# Altium PCB PCB1.PcbDoc
Units mil, origin at the board's own origin, x right, y up, seen from the top; angles counter-clockwise.
Board outline 3255 x 2045 mil, 2 copper layers (Top Layer, Bottom Layer); 19 components, 24 nets, 80 pads, 0 vias.
Unrouted connection lines stored in the file: 37.
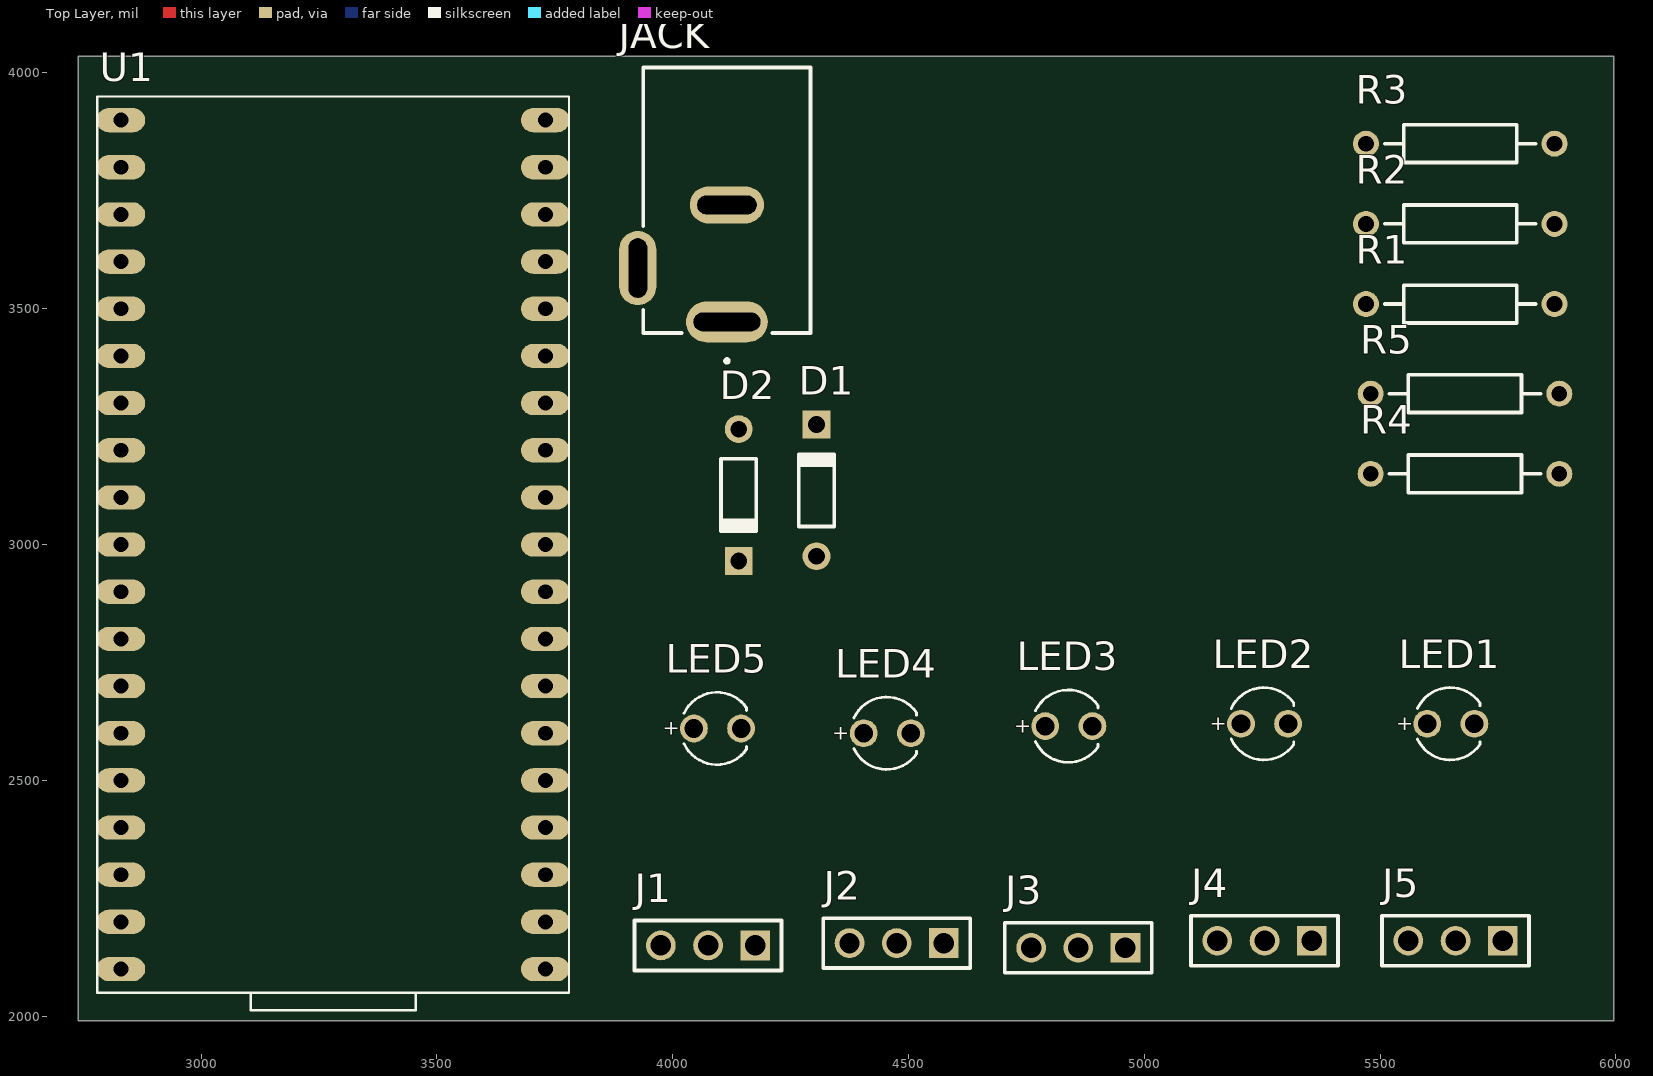
[diagram p0: Top Layer view]
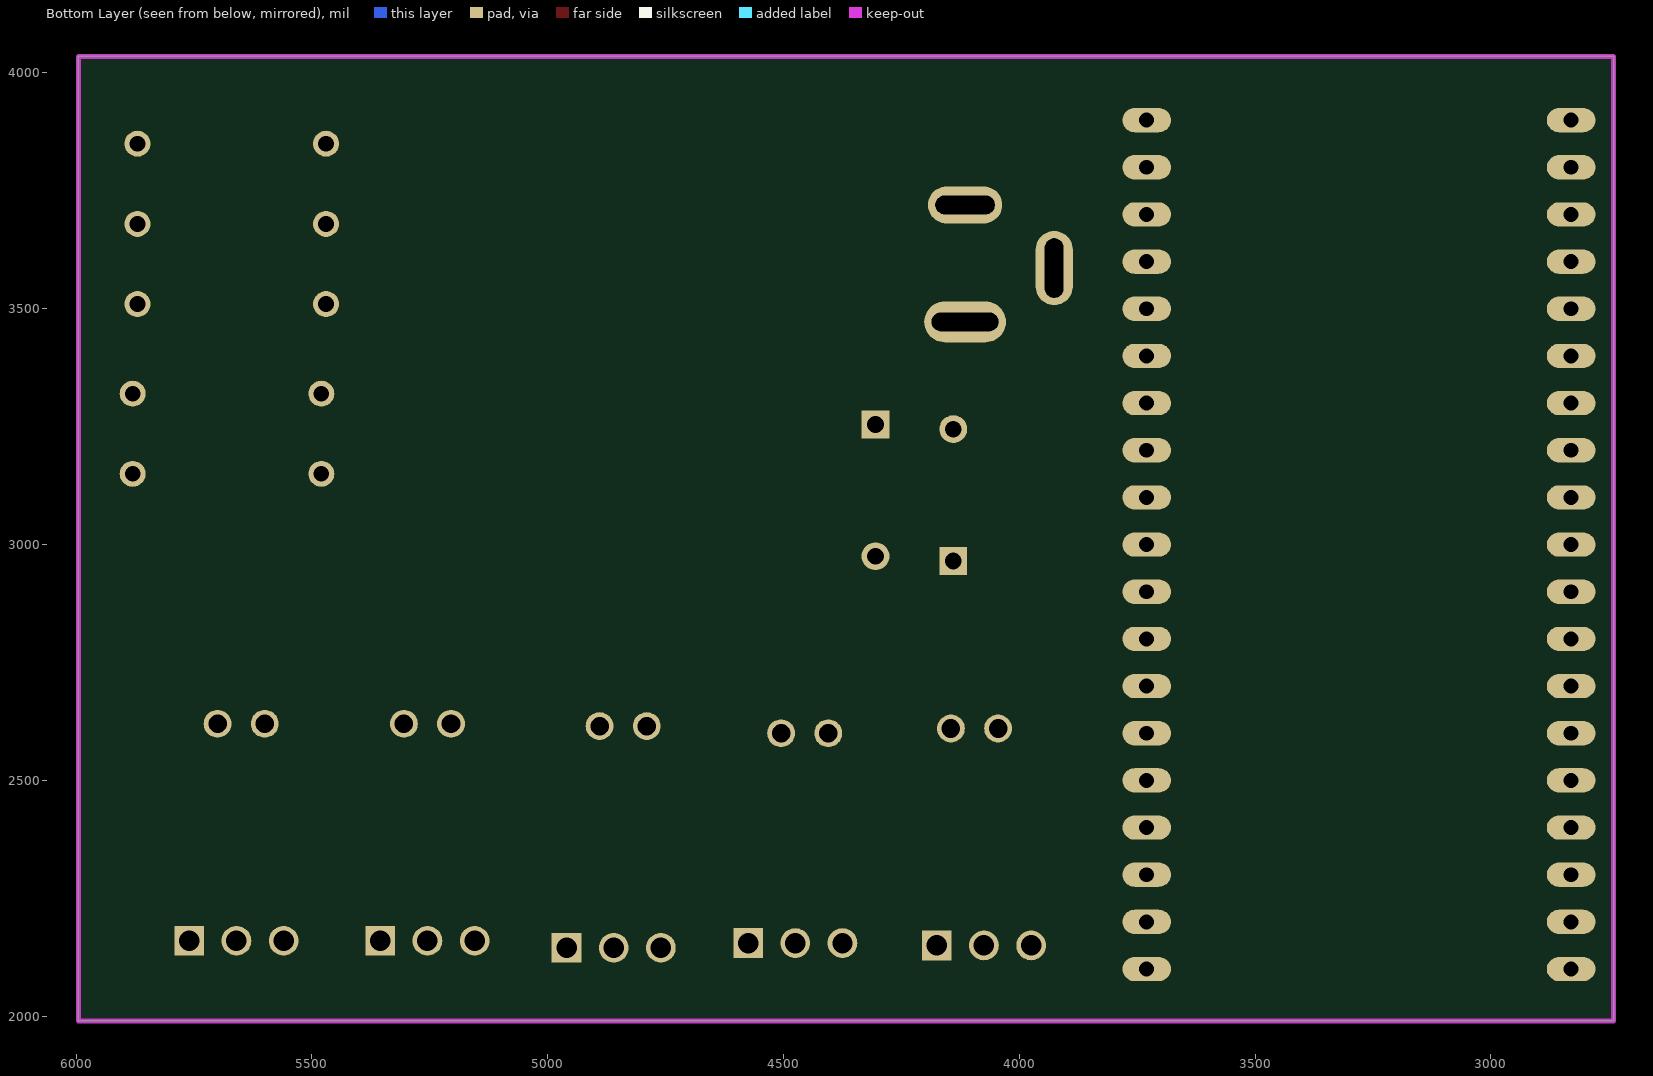
[diagram p1: Bottom Layer view, seen from below]

## Layer stack, top to bottom
Top Solder: solder mask 0.4, Solder Resist, Dk 3.5
Top Layer: signal copper 1.4
Dielectric 1: dielectric 12.6, FR-4, Dk 4.8
Bottom Layer: signal copper 1.4
Bottom Solder: solder mask 0.4, Solder Resist, Dk 3.5

## Board outline
2740,1990 2740,4035 5995,4035 5995,1990

## Design rules (kind name [scope] priority, off if disabled: settings)
Clearance [All] p1: gap=10 ignorepadtopadclearanceinfootprint=FALSE except(0: Arc-Hole Track-Hole SMDPad-Hole THPad-Hole Via-Hole Fill-Hole Poly-Hole Region-Hole Text-Hole)
PolygonConnect [All] p1: connectstyle=Relief reliefconductorwidth=10 reliefentries=4 polygonreliefangle="90 Angle" airgapwidth=10
RoomDefinition "Copy of SCH Placa presentation" [InComponentClass('Copy of SCH Placa presentation')] p1: confinementstyle=ConfineIn formatcopy=TRUE lockcomponents=FALSE outline 2740,1990 5995,1990 5995,4035 2740,4035
RoutingVias [All] p1: holewidth=28 width=50 viastyle="Through Hole" minholewidth=28 minwidth=50 maxholewidth=28 maxwidth=50
SolderMaskExpansion [All] p1: expansion=4 istentingtop=FALSE
Width [All] p1: maxlimit=10 minlimit=10 preferedwidth=10
30 further rules are at their usual default settings.

## Components (designator, comment, footprint, x,y, rotation, side; value= is the part's Value field where it differs from the comment)
D1 "Diode 1N4148" DO-35 4305,3115 r90 top
D2 "Diode 1N4148" DO-35 4140,3105 r270 top
J1 "61300311121" 61300311121 4075,2150 r180 top
J2 "61300311121" 61300311121 4475,2155 r180 top
J3 "61300311121" 61300311121 4860,2145 r180 top
J4 "61300311121" 61300311121 5255,2160 r180 top
J5 "61300311121" 61300311121 5660,2160 r180 top
JACK "DCJ200-10-A-XX-K_REVA" GCT_DCJ200-10-A-XX-K_REVA 4115,3730 r180 top
LED1 "Blue, 3.2V, 40deg" "LED RED 3MM" 5650,2620 r0 top
LED2 "Blue, 3.2V, 40deg" "LED RED 3MM" 5255,2620 r0 top
LED3 "Blue, 3.2V, 40deg" "LED RED 3MM" 4840,2615 r0 top
LED4 "Blue, 3.2V, 40deg" "LED RED 3MM" 4455,2600 r0 top
LED5 "Blue, 3.2V, 40deg" "LED RED 3MM" 4095,2610 r0 top
R1 "Res" "RES AXIAL-0.4" 5670,3510 r0 top value=1K
R2 "Res" "RES AXIAL-0.4" 5670,3680 r0 top value=1K
R3 "Res" "RES AXIAL-0.4" 5670,3850 r0 top value=1K
R4 "Res" "RES AXIAL-0.4" 5680,3150 r0 top value=1K
R5 "Res" "RES AXIAL-0.4" 5680,3320 r0 top value=1K
U1 "NODE MCU 32S" BOARD 3280,3000 r0 top

## Footprints (in the part's own frame and the unit in brackets; to place one, negate y for a bottom-side part, rotate by r counter-clockwise, add the part's x,y. Pads: shape width x height; smd on the part's side, far side on the other; paste and mask are expansions set on the pad)
61300311121 [mm] "Pin Header, pitch 2.54 mm, THT, Vertical, single row, 3p"
  rect 1.6x1.6 hole 1.1: 1(-2.54,0)
  round 1.6 hole 1.1: 2(0,0) 3(2.54,0)
  silkscreen extent -3.96,-1.35 3.96,1.35, body extent -3.81,-1.27 3.81,1.27, height 8.57
BOARD [mm]
  oval 2.616x1.308 hole 0.8: 1(-11.43,22.86) 2(-11.43,20.32) 3(-11.43,17.78) 4(-11.43,15.24) 5(-11.43,12.7) 6(-11.43,10.16) 7(-11.43,7.62) 8(-11.43,5.08) 9(-11.43,2.54) 10(-11.43,0) 11(-11.43,-2.54) 12(-11.43,-5.08) 13(-11.43,-7.62) 14(-11.43,-10.16) 15(-11.43,-12.7) 16(-11.43,-15.24) 17(-11.43,-17.78) 18(-11.43,-20.32) 19(-11.43,-22.86) 20(11.43,22.86) 21(11.43,20.32) 22(11.43,17.78) 23(11.43,15.24) 24(11.43,12.7) 25(11.43,10.16) 26(11.43,7.62) 27(11.43,5.08) 28(11.43,2.54) 29(11.43,0) 30(11.43,-2.54) 31(11.43,-5.08) 32(11.43,-7.62) 33(11.43,-10.16) 34(11.43,-12.7) 35(11.43,-15.24) 36(11.43,-17.78) 37(11.43,-20.32) 38(11.43,-22.86)
  silkscreen extent -12.7,-25.08 12.7,24.13, body extent -12.78,-24.77 12.77,24.14, height 9.71
DO-35 [mm] "Diode, Axial; Body 3.8 x 1.9 mm (LxDia. max), Lead Dia. 0.53 mm (max)"
  round 1.5 hole 0.9: 1(-3.55,0)
  rect 1.5x1.5 hole 0.9: 2(3.55,0)
  silkscreen extent -1.95,-0.95 2.05,0.95, body extent -4.06,-1.27 4.06,1.22, height 3.23
GCT_DCJ200-10-A-XX-K_REVA [mm]
  oval 4.4x2.2 hole 1 slot 3.6 at 0 deg: 1(0,6.55)
  oval 4x2 hole 1 slot 3.2 at 0 deg: 2(0,0.25)
  oval 2x4 hole 1 slot 3.2 at 90 deg: 3(4.8,3.65)
  silkscreen extent -4.5,-7.15 4.5,8.75, body extent -4.5,-7.15 5.05,7.15, height 11
"LED RED 3MM" [mm] "THT Mono-color Round Color LED, 2-leads"
  round 1.5 hole 1: 1(1.27,0) 2(-1.27,0)
  silkscreen extent -1.8,-1.95 1.57,1.95, body extent -1.92,-1.92 1.52,1.92, height 5.38
"RES AXIAL-0.4" [mm] "Axial Device, Thru-Hole; 2 Leads; 0.4 in Pin Spacing"
  round 1.4 hole 0.85: 1(-5.08,0) 2(5.08,0)
  silkscreen extent -4.06,-1.02 4.06,1.02, body extent -5.47,-1.14 5.47,1.4, height 2.72

## Part data
D1 D2: "High Conductance Fast Diode", Code_JEDEC=DO-204-AH, ComponentLink1Description="Manufacturer Link", ComponentLink1URL=http://www.fairchildsemi.com/, ComponentLink2Description=Datasheet, ComponentLink2URL=http://www.fairchildsemi.com/ds/1N%2F1N4148.pdf, DatasheetVersion=1997, LatestRevisionDate=17-Jul-2002, LatestRevisionNote="Re-released for DXP Platform.", PackageDescription="Diode, Axial; Body 3.8 x 1.9 mm (LxDia. max), Lead Dia. 0.53 mm (max)", PackageReference=DO-35, Published=8-Jun-2000, Publisher="Altium Limited"
J1 J2 J3 J4 J5: "WR-PHD Pin Header, THT, pitch 2.54mm, Single Row, Vertical, 3pin", Contact Resistance=20mOhm, Operating Temperature="-40 to +105degC", Rated Current=3A, Withstanding Voltage=500VAC, Working Voltage=250VAC, ComponentLink1Description=Manufacturer, ComponentLink1URL=http://www.we-online.de, ComponentLink2Description=Datasheet, ComponentLink2URL=https://katalog.we-online.de/em/datasheet/6130xx11121.pdf, Gender=Male, Mounting Technology=THT, Orientation=Vertical, Packaging=Bag, Part Number=61300311121, Pin Number=3, Pitch=2.54mm, Published Date="June 2019", Publisher="Wurth Elektronik", Row Number=Single
JACK: "Power Barrel Connector Jack 2.05mm ID (0.081), 5.50mm OD (0.217) Through Hole, Right Angle", Package=None, Check_prices=https://www.snapeda.com/parts/DCJ200-10-A-K1-K/Global+Connector+Technology/view-part/?ref=eda, MF="Global Connector Technology", MP=DCJ200-10-A-K1-K, SnapEDA_Link=https://www.snapeda.com/parts/DCJ200-10-A-K1-K/Global+Connector+Technology/view-part/?ref=snap
LED1 LED2 LED3 LED4 LED5: library part LED, "LED WL-TMRC THT Mono-color Round", Emitting Color=Blue, Forward Voltage=3.2V, Operating Temperature="-40 to +85degC", Part Number=151051BS04000, Chip Technology=GaN, ComponentLink1Description=Manufacturer, ComponentLink1URL=http://www.we-online.de, ComponentLink2Description=Datasheet, ComponentLink2URL=https://katalog.we-online.de/led/datasheet/151051BS04000.pdf, Dominant Wavelength=470nm, Luminous Intensity=500mcd, Mounting Technology=THT, Packaging=Bulk, Peak Wavelength=465nm, Published Date="October 2019", Publisher="Wurth Elektronik", Size=5mm, Viewing Angle=40deg
R1 R2 R3 R4 R5: "Resistor", LatestRevisionDate=17-Jul-2002, LatestRevisionNote="Re-released for DXP Platform.", PackageDescription="Axial Device, Thru-Hole; 2 Leads; 0.4 in Pin Spacing", PackageReference=AXIAL-0.4, Published=8-Jun-2000, Publisher="Altium Limited"
U1: Package=None, Availability=Warning, Check_prices=https://www.snapeda.com/parts/ESP32-DEVKITC-32D/Espressif%20Systems/view-part/2777395/?ref=eda, MF="Espressif Systems", MP=ESP32-DEVKITC-32D, Price=None, Purchase-URL=https://pricing.snapeda.com/search/part/ESP32-DEVKITC-32D/?ref=eda, SnapEDA_Link=https://www.snapeda.com/parts/ESP32-DEVKITC-32D/Espressif%20Systems/view-part/2777395/?ref=snap

## Nets (pads, with @x,y where several pads share a name; then routed paths per layer and width w, separated by ;. In a path a pad name is that pad's centre, name@x,y a point inside that pad or via, vN(x,y) a via of type N, cw(c..) or ccw(c..) an arc to the next point about the centre after c; other vN are vias at no path point)
GND: D2.2 J1.3 J2.3 J3.3 J4.3 J5.3 LED1.1 LED2.1 LED3.1 LED4.1 LED5.1 U1.5 U1.14 U1.20 U1.26
NetD1_1: D1.1 J1.2 J2.2 J3.2 J4.2 J5.2 U1.2
NetD1_2: D1.2 JACK.1
NetD2_1: D2.1 JACK.2
NetJ1_1: J1.1 U1.28
NetJ2_1: J2.1 U1.29
NetJ3_1: J3.1 U1.30
NetJ4_1: J4.1 U1.31
NetJ5_1: J5.1 U1.32
NetLED1_2: LED1.2 R1.2
NetLED2_2: LED2.2 R2.2
NetLED3_2: LED3.2 R3.2
NetLED4_2: LED4.2 R4.2
NetLED5_2: LED5.2 R5.2
NetR1_1: R1.1 U1.6
NetR2_1: R2.1 U1.7
NetR3_1: R3.1 U1.8
NetR4_1: R4.1 U1.33
NetR5_1: R5.1 U1.34
NetU1_9: U1.9
NetU1_10: U1.10
NetU1_11: U1.11
NetU1_12: U1.12
NetU1_13: U1.13
pads on no net: JACK.3 U1.1 U1.3 U1.4 U1.15 U1.16 U1.17 U1.18 U1.19 U1.21 U1.22 U1.23 U1.24 U1.25 U1.27 U1.35 U1.36 U1.37 U1.38

## Keep-outs
Bottom Layer:
  the board outline again, w10

## Text inside footprints (layer, text, board x,y; h text height)
LED1: Top Overlay "+" at 5533.86,2606.22 h31.5
LED2: Top Overlay "+" at 5138.86,2606.22 h31.5
LED3: Top Overlay "+" at 4723.86,2601.22 h31.5
LED4: Top Overlay "+" at 4338.86,2586.22 h31.5
LED5: Top Overlay "+" at 3978.86,2596.22 h31.5